# Altium PCB XIREI-V10.PcbDoc
Units mil, origin at the board's own origin, x right, y up, seen from the top; angles counter-clockwise.
Board outline 6000 x 4000 mil, 2 copper layers (Top Layer, Bottom Layer); 57 components, 73 nets, 265 pads, 69 vias.
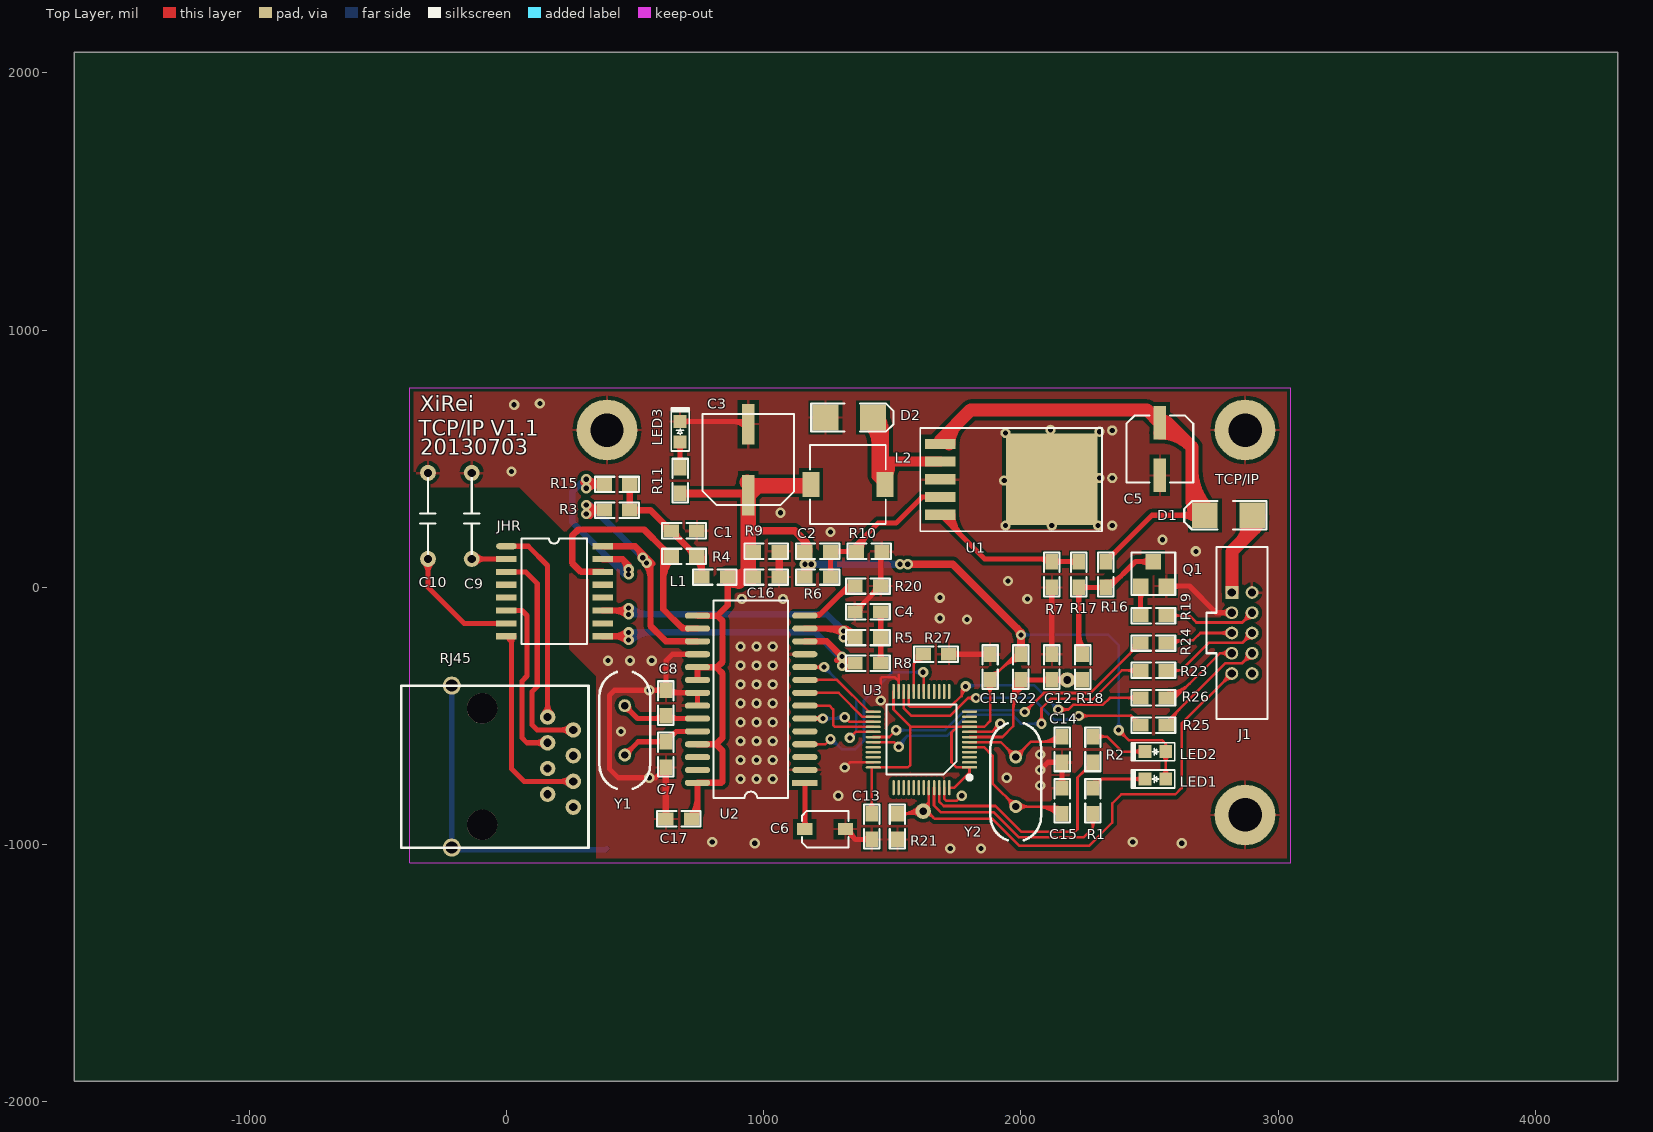
[diagram p0: Top Layer view]
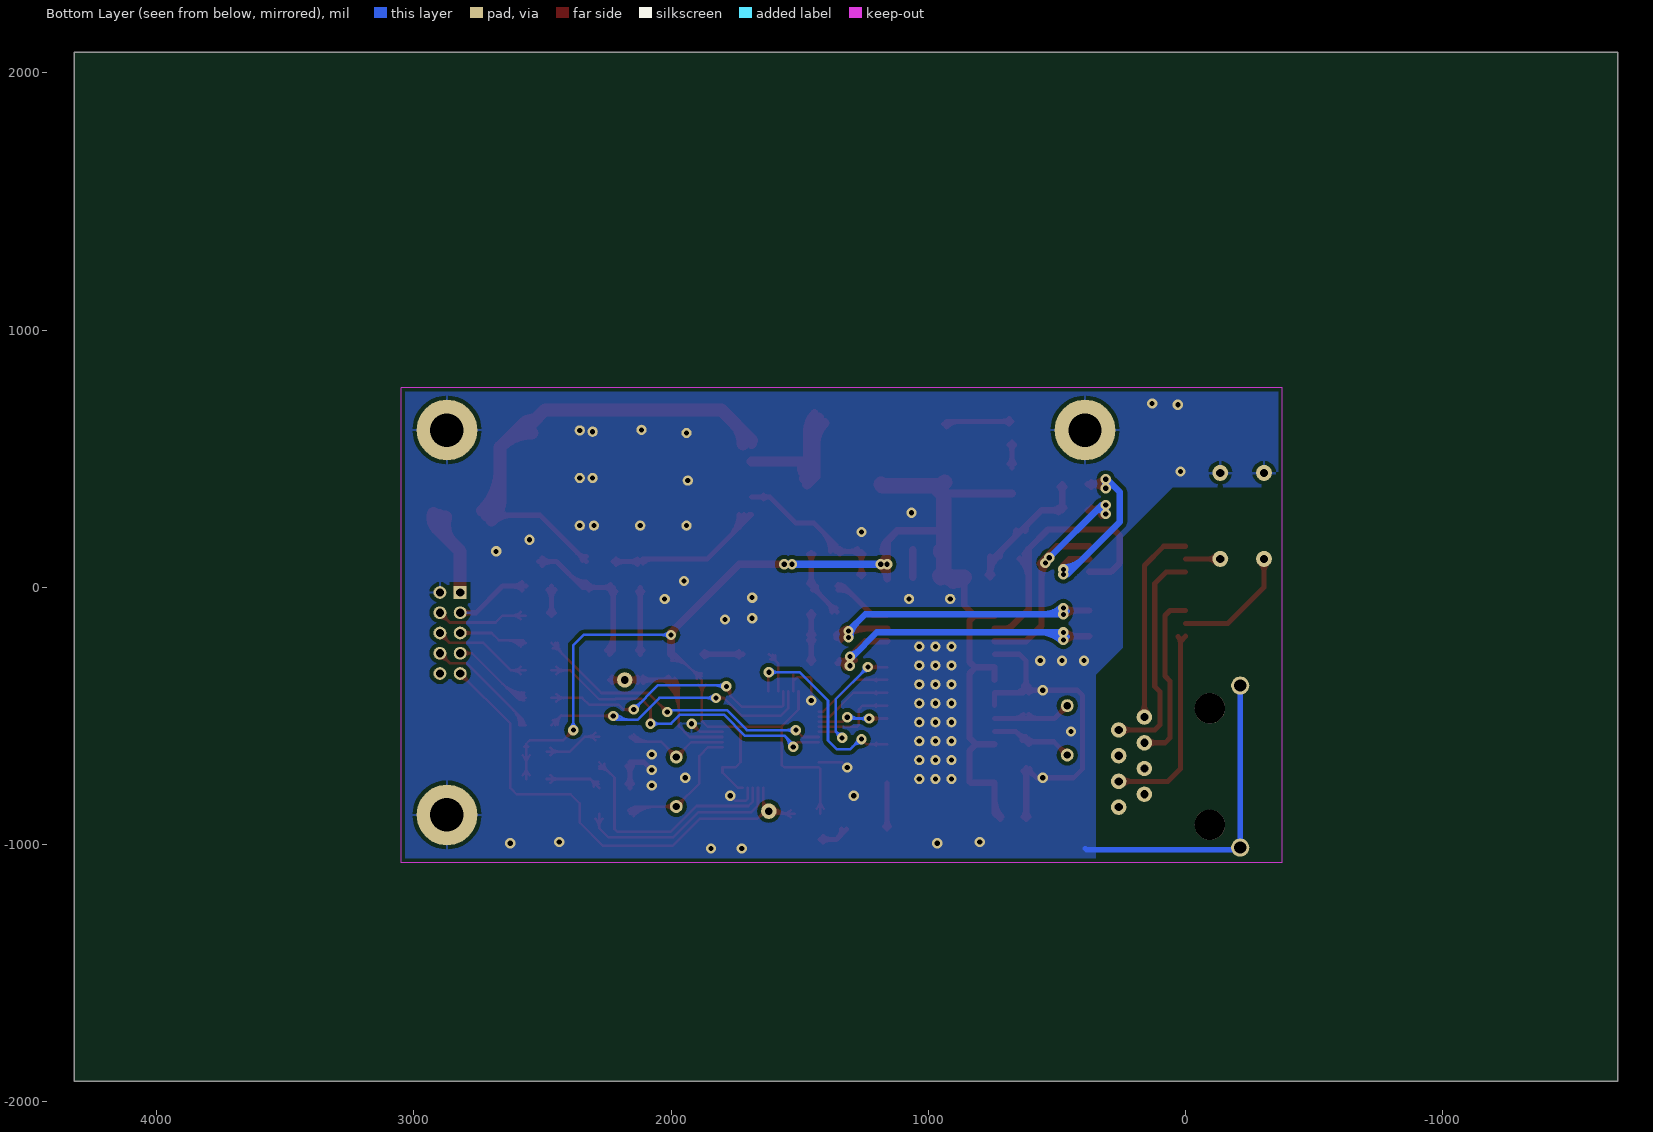
[diagram p1: Bottom Layer view, seen from below]

## Layer stack, top to bottom
Top Layer: signal copper 1.4
Dielectric: dielectric 12.6, FR-4, Dk 4.8
Bottom Layer: signal copper 1.4

## Board outline
-1680,-1920 4320,-1920 4320,2080 -1680,2080

## Design rules (kind name [scope] priority, off if disabled: settings)
Clearance [All] p1: gap=8
PolygonConnect [All] p1: connectstyle=Relief reliefconductorwidth=10 reliefentries=4 polygonreliefangle="90 Angle"
RoutingVias [All] p1: holewidth=20 width=40 viastyle="Through Hole" minholewidth=3 minwidth=10 maxholewidth=78.74 maxwidth=80
SilkscreenOverComponentPads [All] p1: minsilkscreentomaskgap=10
SolderMaskExpansion [All] p1: expansion=4
TestPointUsage [All] p1: valid=0 allowmultiple=FALSE
Testpoint [All] p1: side=15 testpointundercomponent=TRUE minsize=40 maxsize=100 preferedsize=60 minholesize=0 maxholesize=40 preferedholesize=32 testpointgrid=1 style=1023 order=0123456789
Width [All] p1: maxlimit=100 minlimit=5 preferedwidth=10
23 further rules are at their usual default settings.

## Components (designator, comment, footprint, x,y, rotation, side; value= is the part's Value field where it differs from the comment)
C1 "0.01uF" 0805 640,220 r180 top
C2 "102" 0805 1160,140 r180 top
C3 "6V/470u(8)" SW-06 940,280 r180 top
C4 "0.01uF" 0805 1455,-95 r0 top
C5 "25V/22u(6)" "CAP 22uF/25V" 2540,640 r0 top
C6 "10uF" "CAP 10uF/16V" 1160,-940 r90 top
C7 "30P" 0805 620,-700 r270 top
C8 "30P" 0805 620,-400 r90 top
C9 "103" C1 -135,445 r270 top
C10 "103" C1 -305,445 r270 top
C11 "0.1UF" 0805 1880,-360 r270 top
C12 "0.1uf" 0805 2120,-360 r270 top
C13 "0.1UF" 0805 1420,-880 r90 top
C14 "20P" 0805 2160,-680 r270 top
C15 "20P" 0805 2160,-780 r90 top
C16 "104" 0805 960,40 r180 top
C17 "104" 0805 720,-900 r0 top
D1 "4004" SMD-D1 2900,280 r0 top
D2 "SS12" SMD-D1 1240,660 r180 top
J1 "2.0*10" J2.0-2*10 2820,-20 r0 top
JHR "" SMD-16B 0,160 r270 top (schematic designator JHR1)
L1 "10UH" 0805 760,40 r180 top
L2 "100u" 55 1180,400 r90 top
LED1 "RED" LED0805 2563,-745 r180 top
LED2 "YELLOW" LED0805 2563,-638.5 r180 top
LED3 "红色" LED0805 675,565 r90 top
Q1 "2N5551" SMD-Q1 2515,100 r270 top
R1 "2.7K" 0805 2280,-880 r270 top
R2 "2.7K" 0805 2280,-680 r270 top
R3 "50R" 0805 380,300 r180 top
R4 "50R" 0805 640,120 r180 top
R5 "1k" 0805 1355,-195 r180 top
R6 "3.3K" 0805 1260,40 r0 top
R7 "1K" 0805 2120,100 r90 top
R8 "1k" 0805 1355,-295 r180 top
R9 "1K" 0805 1060,140 r0 top
R10 "2K" 0805 1460,140 r0 top
R11 "3K" 0805 675,465 r90 top
R15 "100" 0805 480,400 r0 top
R16 "100K" 0805 2330,0 r270 top
R17 "220" 0805 2225,100 r90 top
R18 "220" 0805 2240,-260 r90 top
R19 "10K" 0805 2465,-110 r180 top
R20 "2.7K" 0805 1355,5 r180 top
R21 "100K" 0805 1520,-980 r270 top
R22 "100K" 0805 2000,-260 r90 top
R23 "220" 0805 2565,-323 r0 top
R24 "220" 0805 2565,-216.5 r0 top
R25 "220" 0805 2465,-536 r180 top
R26 "220" 0805 2465,-429.5 r180 top
R27 "100K" 0805 1720,-260 r0 top
RJ45 "CON10" RJ45 260,-500 r270 top (schematic designator RJ1)
U1 "LM2596S-ADJ" 44 2120,420 r180 top
U2 "ENC28J60" SOP-28 1160,-760 r180 top
U3 "STM32" LQFP-48 1800,-700 r180 top
Y1 "25MHZ" XTAL_US 460,-460 r270 top
Y2 "8MHZ" XTAL_US 1980,-660 r270 top

## Footprints (in the part's own frame and the unit in brackets; to place one, negate y for a bottom-side part, rotate by r counter-clockwise, add the part's x,y. Pads: shape width x height; smd on the part's side, far side on the other; paste and mask are expansions set on the pad)
44 [mm]
  rect 3x1 smd: 1(11,-3.5) 2(11,-1.75) 3(11,0) 4(11,1.75) 5(11,3.5)
  rect 9x9 smd: 6(0,0)
  silkscreen extent -4.97,-5.08 12.98,5.12
55 [mm]
  rect 2.5x1.7 smd: 1(0,-7.4) 2(0,-0.1)
  silkscreen extent -3.91,-7.49 3.9,0
0805 [mil]
  rect 60x50 smd: 1(0,0) 2(-100,0)
  silkscreen extent -135,-30 35,30
C1 [mil]
  round 62 hole 32: 1(334.65,0) 2(0,0)
  silkscreen extent 20,-30 315,30
"CAP 10uF/16V" [mm]
  rect 1.2x1.5 smd: 1(0,0) 2(0,-4)
  silkscreen extent -1.8,-4.3 1.8,0.3
"CAP 22uF/25V" [mm]
  rect 1.2x3.3 smd: 1(0,0) 2(0,-5.2)
  silkscreen extent -3.3,-5.9 3.3,0.7
J2.0-2*10 [mm]
  rect 1.27x1.27 hole 0.813: 1(0,0)
  round 1.27 hole 0.813: 2(2,0) 3(0,-2) 4(2,-2) 5(0,-4) 6(2,-4) 7(0,-6) 8(2,-6) 9(0,-8) 10(2,-8)
  silkscreen extent -2.5,-12.5 3.5,4.5
LED0805 [mil]
  rect 50x50 smd: 1(0,0) 2(80,0)
  silkscreen extent -35,-35 134,35
LQFP-48 [mm]
  rect 1.5x0.25 smd: 1(0,0)
  oval 1.5x0.25 smd: 2(0,-0.5) 3(0,-1) 4(0,-1.5) 5(0,-2) 6(0,-2.5) 7(0,-3) 8(0,-3.5) 9(0,-4) 10(0,-4.5) 11(0,-5) 12(0,-5.5) 25(9.5,-5.5) 26(9.5,-5) 27(9.5,-4.5) 28(9.5,-4) 29(9.5,-3.5) 30(9.5,-3) 31(9.5,-2.5) 32(9.5,-2) 33(9.5,-1.5) 34(9.5,-1) 35(9.5,-0.5) 36(9.5,0)
  oval 0.25x1.5 smd: 13(2,-7.5) 14(2.5,-7.5) 15(3,-7.5) 16(3.5,-7.5) 17(4,-7.5) 18(4.5,-7.5) 19(5,-7.5) 20(5.5,-7.5) 21(6,-7.5) 22(6.5,-7.5) 23(7,-7.5) 24(7.5,-7.5) 37(7.5,2) 38(7,2) 39(6.5,2) 40(6,2) 41(5.5,2) 42(5,2) 43(4.5,2) 44(4,2) 45(3.5,2) 46(3,2) 47(2.5,2) 48(2,2)
  silkscreen extent -0.2,-6.21 8.21,1.2
RJ45 [mm]
  round 3 hole 3: 0(-0.75,-9) 0(10.75,-9)
  round 1.524 hole 0.813: 1(0.11,-2.54) 2(1.38,0) 3(2.65,-2.54) 4(3.92,0) 5(5.19,-2.54) 6(6.46,0) 7(7.73,-2.54) 8(9,0)
  round 1.8 hole 1.2: 9(-3,-12) 10(13,-12)
  silkscreen extent -3,-17 13,1.5
SMD-16B [mil]
  oval 24x80 smd: 1(0,0)
  rect 24x80 smd: 2(50,0) 3(100,0) 4(150,0) 5(200,0) 6(250,0) 7(300,0) 8(350,0) 9(350,374.02) 10(300,374.02) 11(250,374.02) 12(200,374.02) 13(150,374.02) 14(100,374.02) 15(50,374.02) 16(0,374.02)
  silkscreen extent -30,58 380,313
SMD-D1 [mil]
  rect 100x100 smd: 1(0,0) 2(-185,0)
  silkscreen extent -265,-55 55,55
SMD-Q1 [mil]
  rect 60x60 smd: B(95,-50) C(0,0) E(95,50)
  silkscreen extent -35,-85 130,85
SOP-28 [mm]
  rect 2.5x0.6 smd: 1(0,0)
  oval 2.5x0.6 smd: 2(0,-1.27) 3(0,-2.54) 4(0,-3.81) 5(0,-5.08) 6(0,-6.35) 7(0,-7.62) 8(0,-8.89) 9(0,-10.16) 10(0,-11.43) 11(0,-12.7) 12(0,-13.97) 13(0,-15.24) 14(0,-16.51) 15(10.6,-16.51) 16(10.6,-15.24) 17(10.6,-13.97) 18(10.6,-12.7) 19(10.6,-11.43) 20(10.6,-10.16) 21(10.6,-8.89) 22(10.6,-7.62) 23(10.6,-6.35) 24(10.6,-5.08) 25(10.6,-3.81) 26(10.6,-2.54) 27(10.6,-1.27) 28(10.6,0)
  silkscreen extent 1.65,-18 9.02,1.5
SW-06 [mm]
  rect 1.27x4 smd: 1(0,-2) 2(0,-9)
  silkscreen extent -4.5,-10 4.5,-1
XTAL_US [mil]
  round 50 hole 28: 1(0,0) 2(192.13,0)
  silkscreen extent -131,-98 323,98

## Part data
C1 C4 C6 C7 C8 C11 C12 C13 C14 C15: library part CAP, "Capacitor"
C2 C9 C10 C16 C17: library part CAP
C3 C5: library part ELECTRO1
D1 D2: library part DIODE
J1: library part CON10, "Connector"
JHR: library part CON16, "Connector"
L1 R3 R4 R5 R8: library part RES1
L2: library part L-1
LED1 LED2: library part LED85YEL, "Yellow LED"
LED3: library part LED
Q1: library part NPN
R1 R2 R6 R7 R9 R10 R11 R15 R16 R17 R18 R19 R20 R21 R22 R23 R24 R25 R26 R27: library part RES2
RJ45: "Connector"
U1: library part LM2596
U2 U3: library part Component_1
Y1 Y2: library part XTAL, "Crystal Oscillator"

## Free pads (board coordinates)
  round 236.22 hole 129.92: 0(390.98,611.41) 1(2871.3,611.41) 2(2871.3,-884.65)
  round 60 hole 30: 0(2180,-360) 1(1620,-870)
  round 40 hole 20: 2(2305,605) 3(2305,425) 4(2300,240) 5(2120,240) 6(1940,240) 7(1935,415) 8(1940,600) 9(2115,612.17) 10(2355,610) 11(2355,425) 12(2355,240) 13(1075,-45) 14(915,-45) 15(910,-230) 16(972.5,-230) 17(1035,-230) 18(910,-303.57) 19(972.5,-303.57) 20(1035,-303.57) 21(910,-377.14) 22(972.5,-377.14) 23(1035,-377.14) 24(910,-450.71) 25(972.5,-450.71) 26(1035,-450.71) 27(910,-524.29) 28(972.5,-524.29) 29(1035,-524.29) 30(910,-597.86) 31(972.5,-597.86) 32(1035,-597.86) 33(910,-671.43) 34(972.5,-671.43) 35(1035,-671.43) 36(910,-745) 37(972.5,-745) 38(1035,-745)

## Via types
v1: diameter 40, hole 20, Top Layer to Bottom Layer, 69 vias

## Nets (pads, with @x,y where several pads share a name; then routed paths per layer and width w, separated by ;. In a path a pad name is that pad's centre, name@x,y a point inside that pad or via, vN(x,y) a via of type N, cw(c..) or ccw(c..) an arc to the next point about the centre after c; other vN are vias at no path point)
+5: C2.1 C3.1 C11.1 C13.1 C16.1 C17.1 L1.2 L2.2 LED1.1 LED2.1 R6.2 R9.2 R11.2 R22.1 U2.15 U2.19 U2.20 U2.25 U2.28 U3.1 U3.9 U3.24 U3.36 U3.48 | length 8081.5
  Top Layer w10: C13.1@1405.86,-860.86 ccw(c1371.72,-826.72) 1420,-826.72 ccw(c1468.28,-826.72) C13.1@1434.14,-860.86 ; C13.1 1420,-705.99 U3.36 1560,-700 1570,-690 1570,-540.28 ; U3.24 1504.73,-475 1570,-540.28 ; U3.48 1741.26,-778.74 1800,-720 U3.1 1750,-700 1730,-680 1730,-565.04 1752.52,-542.52 ; C11.1@1865.86,-379.14 cw(c1831.72,-413.28) 1880,-413.28 cw(c1928.28,-413.28) C11.1@1894.14,-379.14 ; C11.1@1880,-345 ccw(c1880,-308.79) 1905.61,-334.39 ; C11.1@1880,-335 ccw(c1880,-274.64) 1922.68,-317.32 ; C11.1@1900,-355 cw(c1936.21,-355) 1910.61,-329.39 ; 1923.18,-316.82 cw(c2000,-393.64) R22.1@2000,-285 ; 1940.25,-299.75 cw(c2000,-359.5) R22.1@2000,-275 ; 1957.32,-282.68 cw(c2000,-325.36) R22.1@2000,-265 ; 1974.39,-265.61 cw(c2000,-291.21) R22.1@2000,-255 ; R22.1 1980,-260 C11.1 1880,-520 1857.48,-542.52 U3.9 1752.52,-542.52 ; v1(2000,-185) v1@2000,-175 ; v1@2380,-570 cw(c2380,-606.21) 2405.61,-580.61 cw(c2431.21,-555) v1@2395,-555 ; v1(2380,-555) 2420,-595 2550,-595 2563,-608 ; LED1.1@2548.86,-730.86 ccw(c2514.72,-696.72) 2563,-696.72 ccw(c2611.28,-696.72) LED1.1@2577.14,-730.86 ; LED2.1@2548.86,-652.64 cw(c2514.72,-686.78) 2563,-686.78 cw(c2611.28,-686.78) LED2.1@2577.14,-652.64 ; LED2.1@2555.03,-620.16 ccw(c2549.75,-608) 2563,-608 ; LED1.1 LED2.1 2563,-608 ; LED2.1@2570.97,-620.16 cw(c2576.25,-608) 2563,-608 ; 1570,-540.28 1572.24,-542.52 1752.52,-542.52
  Top Layer w25: C17.1@716.16,-891.16 ccw(c652.15,-827.15) 742.68,-827.15 ; C17.1 742.68,-877.32 U2.28 835,-760 840,-755 840,-635 815,-610 ; U2.25 815,-610 ; U2.20 U2.19 820,-310 ; U2.15 820,-110 ; L1.2@851.16,31.16 cw(c829.82,9.82) 860,9.82 cw(c890.18,9.82) L1.2@868.84,31.16 ; L1.2 860,-70 820,-110 ; 815,-610 840,-585 840,-335 820,-315 820,-310 ; 820,-310 840,-290 840,-130 820,-110
  Top Layer w30: R11.2 C3.1@946.26,365 ; 900.74,365 cw(c900.74,319.48) C3.1@932.93,351.67 ; 940,235 955,220 1120,220 1160,180 C2.1 ; 1157.32,182.68 cw(c1114.64,140) C2.1@1175,140 ; R6.2@1160,34.1 cw(c1222.08,34.1) v1@1187.76,85.83 ; R6.2 v1(1160,90) ; 1171.18,110.83 ccw(c1185,90) v1(1160,90) ; 1173.24,67.94 cw(c1185,90) v1(1160,90) ; v1(1185,90) v1(1160,90) ; v1@1187.35,94.41 cw(c1211.66,140) C2.1 ; v1(1530,90) v1(1560,90) 1735,90 v1@2000,-175 ; 1984.39,-159.39 cw(c1958.79,-185) v1@1995,-185 ; R22.1 v1(2000,-185) ; v1(1160,90) C2.1
  Top Layer w60: L1.2 920,40 ; L1.2@861.98,36.01 ccw(c888.7,71.29) 920,40 ; L1.2@864.26,35.06 ccw(c877.41,122.59) C16.1@940,60 ; 903.79,23.79 cw(c955,-27.43) C16.1@955,45 ; C16.1@940,64.14 ccw(c979.14,64.14) C16.1@951.46,36.46 ; R9.2@940,115.86 cw(c979.14,115.86) R9.2@951.46,143.54 ; R9.2@940,164.14 ccw(c979.14,164.14) R9.2@951.46,136.46 ; L2.2 1178.94,395 976.26,395 946.26,365 C3.1 940,235 C16.1@940,60 ; 920,40 C16.1@940,60 ; C3.1@936.46,408.94 ccw(c970.13,442.61) 970.13,395 cw(c970.13,442.61) C3.1@936.46,408.94
  Bottom Layer w10: v1(2000,-185) 2340,-185 2380,-225 v1(2380,-555) ; v1@2010.61,-195.61 cw(c2036.21,-221.21) 2036.21,-185 cw(c2036.21,-148.79) v1@2010.61,-174.39 ; v1@2369.39,-544.39 ccw(c2343.79,-518.79) 2380,-518.79 ccw(c2416.21,-518.79) v1@2390.61,-544.39
  Bottom Layer w30: v1(1160,90) v1(1185,90) v1(1530,90) v1(1560,90)
+12: D1.1 J1.1 | length 601.1
  Top Layer w50: J1.1 2820,140 2900,220 ; 2850,170 ccw(c2776.73,243.28) D1.1@2876.04,272.86 ; D1.1@2882.4,262.25 cw(c2840.51,220) 2900,220 ; D1.1 2900,220 ; 2909.32,229.32 ccw(c2868.14,270.51) D1.1@2923.96,287.14 ; D1.1@2917.6,262.25 ccw(c2959.49,220) 2900,220
BOOT0: J1.9 pad.1@1620,-870 R21.2 U3.44 | length 2334.7
  Top Layer w10: R21.2 1597.52,-880 1642.52,-835 ; R21.2@1534.14,-894.14 cw(c1568.28,-928.28) 1568.28,-880 cw(c1568.28,-831.72) R21.2@1534.14,-865.86 ; R21.2@1535.5,-880 ccw(c1535.5,-785.5) pad.1@1602.32,-852.32 ; 1559.64,-880 ccw(c1559.64,-809.64) pad.1@1609.39,-859.39 ; pad.1@1602.32,-887.68 ccw(c1583.79,-906.21) 1583.79,-880 ccw(c1583.79,-833.79) pad.1@1616.46,-866.46 ; pad.1@1623.49,-884.59 cw(c1632.5,-922.23) 1659.86,-894.86 ; U3.44 1642.52,-835 ; pad.1@1645,-870 ccw(c1669.14,-870) 1652.07,-887.07 ; J1.9@2800,-334.96 cw(c2751.72,-334.96) 2785.86,-369.1 cw(c2820,-403.25) J1.9@2820,-354.96 ; J1.9 2625,-529.96 2625,-780 2600,-805 2390,-805 2355,-840 2355,-915 2265,-1005 1993.69,-1005 1888.69,-900 1665,-900 1642.52,-877.52 1642.52,-835
CLKOUT: U2.3
CS: U2.9 U3.25 | length 343
  Top Layer w10: U2.9 1285,-360 1408.47,-483.47 U3.25 ; U2.9@1202.22,-364.82 cw(c1213.84,-376.44) 1213.84,-360 cw(c1213.84,-343.56) U2.9@1202.22,-355.18
ERX+: JHR.6 RJ45.3 | length 755.4
  Top Layer w20: JHR.6 60,-90 80,-110 80,-345 60,-365 60,-585 79.33,-604.33 RJ45.3 ; RJ45.3@145.86,-618.47 ccw(c111.72,-652.62) 111.72,-604.33 ccw(c111.72,-556.05) RJ45.3@145.86,-590.19
ERX-: JHR.8 RJ45.6 | length 907.6
  Top Layer w20: JHR.8 20,-210 20,-705 69.33,-754.33 RJ45.6 ; 20,-214.14 cw(c52.14,-214.14) JHR.8@29.41,-191.41 ; 20,-211.54 cw(c46.2,-211.54) JHR.8@29.29,-191.53 ; RJ45.6@245.86,-768.47 ccw(c211.72,-802.62) 211.72,-754.33 ccw(c211.72,-706.05) RJ45.6@245.86,-740.19
ETX+: JHR.1 RJ45.1 | length 856.2
  Top Layer w20: JHR.1 85,160 160,85 160,-500 RJ45.1 ; RJ45.1@145.86,-490.19 ccw(c111.72,-456.05) 160,-456.05 ccw(c208.28,-456.05) RJ45.1@174.14,-490.19
ETX-: JHR.3 RJ45.2 | length 940.8
  Top Layer w20: JHR.3 75,60 120,15 120,-385 100,-405 100,-535 119.33,-554.33 RJ45.2 ; RJ45.2@245.86,-568.47 ccw(c211.72,-602.62) 211.72,-554.33 ccw(c211.72,-506.05) RJ45.2@245.86,-540.19
GND: C1.2 C3.2 C4.2 C5.2 C6.2 C7.1 C8.1 C9.2 C10.2 C11.2 C12.2 C13.2 C14.1 C15.1 C16.2 C17.2 D2.1 J1.2 J1.3 LED3.2 pad.0@390.98,611.41 pad.1@2871.3,611.41 pad.2 pad.3 pad.4 pad.5 pad.6 pad.7 pad.8 pad.9 pad.10 pad.11 pad.12 pad.13 pad.14 pad.15 pad.16 pad.17 pad.18 pad.19 pad.20 pad.21 pad.22 pad.23 pad.24 pad.25 pad.26 pad.27 pad.28 pad.29 pad.30 pad.31 pad.32 pad.33 pad.34 pad.35 pad.36 pad.37 pad.38 Q1.E R7.2 R9.1 R10.1 R20.2 R21.1 R27.1 RJ45.9 RJ45.10 U1.3 U1.6 U2.2 U2.11 U2.18 U2.21 U2.22 U3.8 U3.23 U3.35 U3.47 | length 6234.5
  Top Layer w10: v1(1315,-700) 1334.68,-680.32 U3.35 ; v1(1455,-440) 1455,-355 1460,-350 1510,-350 1524.41,-364.41 U3.23 1524.41,-360 1524.41,-340.59 1525,-340 ; U3.47 1701.57,-821.57 1710,-830 1750,-830 v1(1770,-810) ; U3.8 1887.8,-562.2 v1(1920,-530) ; v1@1905,-530 cw(c1868.79,-530) 1894.39,-555.61 cw(c1920,-581.21) v1@1920,-545
  Top Layer w20: 585.86,-734.14 cw(c620,-768.28) C7.1@620,-720 ; C7.1@597.93,-722.07 ccw(c580.86,-705) C7.1@605,-705 ; C8.1@609.39,-410.61 ccw(c583.79,-436.21) 583.79,-400 ccw(c583.79,-363.79) C8.1@609.39,-389.39 ; C8.1@609.39,-384.39 ccw(c583.79,-358.79) 620,-358.79 ccw(c656.21,-358.79) C8.1@630.61,-384.39 ; C7.1 580,-740 435,-740 400,-705 400,-420 420,-400 C8.1 ; C8.1@630.61,-394.39 ccw(c668.28,-356.72) 668.28,-410 ; LED3.2 929.33,645 C3.2 ; LED3.2@685.61,634.39 cw(c711.21,608.79) 711.21,645 cw(c711.21,681.21) LED3.2@685.61,655.61 ; U2.22 U2.21 630,-410 C8.1 ; U2.18 645,-260 620,-285 C8.1 ; 878.03,645 cw(c878.03,572.36) C3.2@929.39,623.72 ; C6.2 1357.48,-980 C13.2 ; C6.2@1337.01,-940 ccw(c1384.15,-940) 1350.82,-973.34 ; C4.2 R20.2 R10.1@1455,135 ; C4.2@1360,-80 ccw(c1360,-55.86) C4.2@1377.07,-72.93 ; C4.2@1375,-95 cw(c1423.28,-95) 1389.14,-60.86 ; C13.2@1409.39,-990.61 ccw(c1383.79,-1016.21) 1383.79,-980 ccw(c1383.79,-943.79) C13.2@1409.39,-969.39 ; 1420.86,-29.14 ccw(c1386.72,5) R20.2@1435,5 ; R20.2@1432.93,-17.07 cw(c1450,-34.14) R20.2@1450,-10 ; R20.2@1444.39,15.61 ccw(c1418.79,41.21) 1455,41.21 ccw(c1491.21,41.21) R20.2@1465.61,15.61 ; R10.1@1444.39,129.39 cw(c1418.79,103.79) 1455,103.79 cw(c1491.21,103.79) R10.1@1465.61,129.39 ; R27.1 C11.2 ; R27.1@1735.61,-270.61 cw(c1761.21,-296.21) 1761.21,-260 cw(c1761.21,-223.79) R27.1@1735.61,-249.39 ; C11.2@1869.39,-270.61 ccw(c1843.79,-296.21) 1843.79,-260 ccw(c1843.79,-223.79) C11.2@1869.39,-249.39 ; v1@2080,-705 2105,-680 C14.1 C15.1 ; C12.2@2109.39,-244.39 ccw(c2083.79,-218.79) 2120,-218.79 ccw(c2156.21,-218.79) C12.2@2130.61,-244.39 ; R7.2@2109.39,-15.61 cw(c2083.79,-41.21) 2120,-41.21 cw(c2156.21,-41.21) R7.2@2130.61,-15.61 ; C12.2 R7.2 ; C15.1@2149.39,-764.39 ccw(c2123.79,-738.79) 2160,-738.79 ccw(c2196.21,-738.79) C15.1@2170.61,-764.39 ; C14.1@2149.39,-695.61 cw(c2123.79,-721.21) 2160,-721.21 cw(c2196.21,-721.21) C14.1@2170.61,-695.61 ; Q1.E 2655,5 2758.74,-98.74 J1.3 ; Q1.E@2579.14,-9.14 cw(c2613.28,-43.28) 2613.28,5 cw(c2613.28,53.28) Q1.E@2579.14,19.14 ; J1.3@2809.39,-109.35 ccw(c2783.79,-134.95) 2783.79,-98.74 ccw(c2783.79,-62.53) J1.3@2809.39,-88.13
  Top Layer w25: C17.2@611.16,-891.16 ccw(c589.82,-869.82) 620,-869.82 ccw(c650.18,-869.82) C17.2@628.84,-891.16 ; C17.2 620,-740 ; 620,-735.18 cw(c650.18,-735.18) 628.84,-713.84 ccw(c650.18,-735.18) 620,-735.18 ; 620,-735.18 ccw(c589.82,-735.18) 611.16,-713.84 cw(c589.82,-735.18) 620,-735.18
  Top Layer w30: C16.2 R9.1 R9.1@1060,145
  Bottom Layer w10: v1(1920,-530) v1@1930,-530
  Bottom Layer w20: RJ45.9 RJ45.10 -204.25,-1020 385,-1020 390,-1015
  other v1: 1725,-1015 1845,-1015 965,-995 2625,-995 800,-990 2435,-990 1290,-810 2075,-770 555,-740 1945,-740 2075,-710 2075,-650 445,-560 555,-400 395,-285 480,-285 565,-285 1790,-125 1685,-120 2025,-45 1685,-40 1950,25 2680,140 2550,185 1260,215 1065,290 20,450 30,710 130,715
GP: R7.1 R17.1 U1.5 | length 934.4
  Top Layer w20: U1.5 1859.13,110 2110,110 R7.1 R17.1 ; U1.5@1695.98,282.2 ccw(c1717.84,282.2) U1.5@1702.39,266.75 ; U1.5@1715.98,282.2 ccw(c1786.13,282.2) 1736.53,232.6 ; U1.5@1735.98,282.2 ccw(c1854.41,282.2) 1770.67,198.46 ; 2071.72,110 cw(c2071.72,56.72) R7.1@2109.39,94.39 ; R7.1@2130.61,89.39 cw(c2156.21,63.79) 2156.21,100 cw(c2156.21,136.21) R7.1@2130.61,110.61 ; R17.1@2214.39,89.39 ccw(c2188.79,63.79) 2188.79,100 ccw(c2188.79,136.21) R17.1@2214.39,110.61
INT(PB0): U2.4 U3.18 | length 934.4
  Top Layer w10: U2.4 1240,-610 v1(1260,-590) ; U2.4@1202.22,-614.82 cw(c1213.84,-626.44) 1213.84,-610 cw(c1213.84,-593.56) U2.4@1202.22,-605.18 ; v1(1620,-330) 1622.84,-332.84 U3.18
  Bottom Layer w10: v1@1260,-605 cw(c1260,-653.28) 1294.14,-619.14 ; v1@1260,-595 cw(c1260,-619.14) 1277.07,-602.07 ; v1(1260,-590) 1265,-590 1305,-630 1355,-630 1390,-595 1390,-440 1500,-330 v1(1620,-330) ; v1@1275,-590 ccw(c1299.14,-590) 1282.07,-607.07 ; v1@1609.39,-340.61 ccw(c1583.79,-366.21) 1583.79,-330 ccw(c1583.79,-293.79) v1@1609.39,-319.39
L_C: J1.7 R26.2 | length 693.7
  Top Layer w10: R26.2 2600,-429.5 ; R26.2@2570,-439.5 ccw(c2570,-391.22) 2604.14,-425.36 ; R26.2@2570,-429.5 ccw(c2570,-357.07) 2621.21,-408.29 ; R26.2@2570,-419.5 ccw(c2570,-322.93) 2638.28,-391.22 ; R26.2@2570,-409.5 ccw(c2570,-288.79) 2655.36,-374.14 ; R26.2@2588.46,-437.19 cw(c2600,-442) 2600,-429.5 ; R26.2@2588.46,-421.81 ccw(c2600,-417) 2600,-429.5 ; J1.7@2805.53,-270.03 ccw(c2773.28,-300.79) 2773.28,-256.22 ; J1.7@2805.53,-242.42 cw(c2773.28,-211.66) 2773.28,-256.22 ; J1.7 2773.28,-256.22 ; 2600,-429.5 2773.28,-256.22
L_S: J1.8 R25.2 | length 714.9
  Top Layer w10: R25.2@2570,-536 cw(c2608.63,-536) 2581.31,-508.69 ; R25.2@2580,-536 cw(c2642.77,-536) 2598.38,-491.62 ; R25.2@2580,-511.86 ccw(c2594.14,-511.86) R25.2@2584.14,-521.86 ; R25.2@2589,-536 R25.2 2580,-521 2580,-510 2795,-295 2859.96,-295 J1.8 ; R25.2@2590,-536 cw(c2676.91,-536) 2615.46,-474.54 ; J1.8@2878.74,-256.22 cw(c2830.46,-256.22) 2864.6,-290.36 cw(c2898.74,-324.51) J1.8@2898.74,-276.22
LED_TEST: R2.1 U3.46 | length 1033.5
  Top Layer w10: U3.46 1681.89,-831.89 1700,-850 1900.91,-850 2000.91,-950 2210,-950 2220,-940 2220,-740 R2.1 ; 2237.32,-722.68 cw(c2280,-765.36) R2.1@2280,-705 ; 2249.39,-710.61 ccw(c2223.79,-685) R2.1@2260,-685 ; 2254.39,-705.61 cw(c2280,-731.21) R2.1@2280,-695
NetC2_2: C2.2 R6.1 R10.2 U1.4 | length 1026
  Top Layer w20: R6.1@1249.39,50.61 ccw(c1223.79,76.21) 1260,76.21 ccw(c1296.21,76.21) R6.1@1270.61,50.61 ; C2.2@1249.39,129.39 cw(c1223.79,103.79) 1260,103.79 cw(c1296.21,103.79) C2.2@1270.61,129.39 ; R6.1 C2.2 R10.2 ; C2.2@1275.61,129.39 cw(c1301.21,103.79) 1301.21,140 cw(c1301.21,176.21) C2.2@1275.61,150.61 ; R10.2@1344.39,129.39 ccw(c1318.79,103.79) 1318.79,140 ccw(c1318.79,176.21) R10.2@1344.39,150.61 ; 1377.68,182.68 ccw(c1420.36,140) R10.2 ; R10.2@1380,140 cw(c1488.64,140) 1411.82,216.82 ; U1.4@1640.71,344.25 ccw(c1624.18,327.72) 1624.18,351.1 ccw(c1624.18,374.48) U1.4@1640.71,357.95 ; U1.4 1616.1,351.1 1515,250 1445,250 1360,165 R10.2
NetC4_1: C4.1 R5.2 R8.2 | length 427.5
  Top Layer w20: R8.2@1444.39,-284.39 ccw(c1418.79,-258.79) 1455,-258.79 ccw(c1491.21,-258.79) R8.2@1465.61,-284.39 ; R5.2@1444.39,-205.61 cw(c1418.79,-231.21) 1455,-231.21 cw(c1491.21,-231.21) R5.2@1465.61,-205.61 ; R5.2@1444.39,-184.39 ccw(c1418.79,-158.79) 1455,-158.79 ccw(c1491.21,-158.79) R5.2@1465.61,-184.39 ; C4.1@1444.39,-105.61 cw(c1418.79,-131.21) 1455,-131.21 cw(c1491.21,-131.21) C4.1@1465.61,-105.61 ; R8.2 R5.2 C4.1
NetC6_1: C6.1 U2.1 | length 231.7
  Top Layer w20: C6.1@1150.37,-930.37 ccw(c1127.11,-907.11) 1160,-907.11 ccw(c1192.89,-907.11) C6.1@1169.63,-930.37 ; C6.1 U2.1
NetC7_2: C7.2 U2.24 Y1.2 | length 491.5
  Top Layer w20: Y1.2 512.13,-600 C7.2 660,-560 U2.24 ; Y1.2@460,-637.13 ccw(c460,-600.91) 485.61,-626.52 ccw(c511.21,-652.13) Y1.2@475,-652.13 ; C7.2@609.39,-610.61 ccw(c583.79,-636.21) 583.79,-600 ccw(c583.79,-563.79) C7.2@609.39,-589.39 ; C7.2@620,-580 ccw(c620,-531.72) 654.14,-565.86 ; C7.2@635,-595 cw(c659.14,-595) C7.2@642.07,-577.93
NetC8_2: C8.2 U2.23 Y1.1 | length 444
  Top Layer w20: Y1.1@460,-475 cw(c460,-511.21) 485.61,-485.61 cw(c511.21,-460) Y1.1@475,-460 ; Y1.1 510,-510 U2.23 ; 571.72,-510 ccw(c571.72,-456.72) C8.2@609.39,-494.39 ; C8.2@630.61,-494.39 ccw(c668.28,-456.72) 668.28,-510
NetC9_1: C9.1 JHR.2 | length 214.3
  Top Layer w20: C9.1@-134.65,110 JHR.2 ; C9.1@-120.15,95.5 cw(c-85.16,60.51) -85.16,110 ; C9.1@-120.15,125.2 ccw(c-83.45,161.91) -83.45,110
NetC10_1: C10.1 JHR.7 | length 553
  Top Layer w20: C10.1@-319.85,95.5 cw(c-355.7,59.66) -305,59.66 cw(c-254.3,59.66) C10.1@-290.15,95.5 ; C10.1 -305,0 -165,-140 JHR.7
NetD2_2: D2.2 L2.1 U1.2 | length 1582.9
  Top Layer w30: D2.2@1400.25,635.25 cw(c1228.63,463.63) 1471.34,463.63 ; D2.2@1421.46,656.46 cw(c1301.06,536.06) 1471.34,536.06 ; D2.2@1442.68,677.68 cw(c1373.48,608.48) 1471.34,608.48 ; L2.1@1458.28,428.8 ccw(c1426.76,460.33) 1471.34,460.33 ccw(c1515.92,460.33) L2.1@1484.39,428.8 ; L2.1@1471.34,446.34 D2.2@1471.34,613.66
  Top Layer w40: D2.2@1403.79,638.79 cw(c1316.36,551.36) 1440,551.36 ; D2.2 1440,645 1440,431.34 L2.1 1471.34,446.34 1490.24,465.24 ; 1440,523.91 ccw(c1579.5,523.91) L2.1@1480.86,425.27 ; L2.1@1462.28,425.71 ccw(c1404.86,488.89) 1490.24,488.89 ; L2.1@1465.94,428.08 ccw(c1449.68,465.23) 1490.24,465.23 ; L2.1@1483.34,421.85 cw(c1516.68,438.79) 1490.24,465.24 ; U1.2 1490.24,488.9 ; 1490.24,465.24 1490.24,488.9
NetJHR1_15: JHR.15 R15.2 | length 1142.8
  Top Layer w25: v1@297.63,407.63 ccw(c316.04,426.04) v1@316.04,400 ; v1(310,385) 325,400 R15.2 ; v1@315.3,379.7 cw(c364.32,330.68) R15.2@364.32,400 ; v1@315.3,425.3 ccw(c376.39,486.39) R15.2@376.39,400 ; R15.2@366.16,391.16 ccw(c344.82,369.82) 344.82,400 ccw(c344.82,430.18) R15.2@366.16,408.84 ; JHR.15 450,110 475,85 v1@475,80 ; 451.59,108.41 cw(c413.18,70) v1@467.5,70
  Bottom Layer w25: 273.43,388.43 cw(c307.63,354.23) v1@311.35,402.45 ; 288.66,403.66 cw(c310,382.32) v1@310,412.5 ; v1(310,420) 305,420 255,370 255,255 460,50 v1(475,50) ; 402.45,107.55 ccw(c475,180.1) v1@475,77.5 ; 436.59,73.41 ccw(c475,111.82) v1@475,57.5 ; 445.13,64.87 ccw(c475,94.75) v1@475,52.5
  other v1: 475,70
NetLED1_2: LED1.2 R1.2 | length 377.8
  Top Layer w10: R1.2 2315,-745 ; R1.2@2281.6,-765.13 ccw(c2285.23,-742.85) R1.2@2301.19,-758.81 ; R1.2@2283.21,-755.26 ccw(c2289.09,-719.09) 2315,-745 ; R1.2@2300,-775 cw(c2336.21,-775) 2310.61,-749.39 ; LED1.2@2468.86,-759.14 ccw(c2434.72,-793.28) 2434.72,-745 ccw(c2434.72,-696.72) LED1.2@2468.86,-730.86 ; LED1.2 2315,-745
NetLED2_2: LED2.2 R2.2 | length 378.9
  Top Layer w10: R2.2 2335,-580 2393.5,-638.5 LED2.2 ; R2.2@2294.14,-594.14 cw(c2328.28,-628.28) 2328.28,-580 cw(c2328.28,-531.72) R2.2@2294.14,-565.86 ; LED2.2@2468.86,-652.64 ccw(c2434.72,-686.78) 2434.72,-638.5 ccw(c2434.72,-590.22) LED2.2@2468.86,-624.36
NetLED3_1: LED3.1 R11.1 | length 213.8
  Top Layer w20: R11.1@664.39,480.61 ccw(c638.79,506.21) 675,506.21 ccw(c711.21,506.21) R11.1@685.61,480.61 ; LED3.1@664.39,554.39 cw(c638.79,528.79) 675,528.79 cw(c711.21,528.79) LED3.1@685.61,554.39 ; R11.1 LED3.1
NetQ1_B: Q1.B R19.1 | length 247.7
  Top Layer w20: Q1.B@2450.86,-9.14 cw(c2416.72,-43.28) 2465,-43.28 cw(c2513.28,-43.28) Q1.B@2479.14,-9.14 ; R19.1@2454.39,-99.39 ccw(c2428.79,-73.79) 2465,-73.79 ccw(c2501.21,-73.79) R19.1@2475.61,-99.39 ; R19.1 Q1.B
NetQ1_C: Q1.C R16.1 R17.2 R18.1 | length 1038.3
  Top Layer w20: R17.2@2214.39,-15.61 cw(c2188.79,-41.21) 2225,-41.21 cw(c2261.21,-41.21) R17.2@2235.61,-15.61 ; R18.1@2225,-230.86 ccw(c2264.14,-230.86) R18.1@2236.46,-258.54 ; 2225,-182.57 ccw(c2312.43,-182.57) R18.1@2250.61,-244.39 ; R17.2@2235.61,-10.61 cw(c2261.21,-36.21) 2261.21,0 cw(c2261.21,36.21) R17.2@2235.61,10.61 ; R18.1 2225,-245 R17.2 R16.1 ; R16.1@2319.39,-10.61 ccw(c2293.79,-36.21) 2293.79,0 ccw(c2293.79,36.21) R16.1@2319.39,10.61 ; R16.1@2330,20 ccw(c2330,104.5) 2389.75,44.75 ; 2355.61,10.61 cw(c2330,36.21) R16.1 ; Q1.C@2500.86,85.86 ccw(c2466.72,51.72) 2466.72,100 ccw(c2466.72,148.28) Q1.C@2500.86,114.14 ; Q1.C 2445,100 2345,0 R16.1
NetR20_1: R20.1 U2.14 | length 374.2
  Top Layer w20: U2.14 1215,-110 1330,5 R20.1 ; U2.14@1197.4,-108.19 ccw(c1197.4,-61.33) 1230.54,-94.46 ; 1290.25,-34.75 cw(c1350,-94.5) R20.1@1350,-10 ; 1324.39,-0.61 cw(c1350,-26.21) R20.1@1350,10
NetR23_2: R23.2 U3.31 | length 1505.8
  Top Layer w10: U3.31 1506.57,-601.57 v1(1525,-620) ; v1@2069.39,-519.39 ccw(c2043.79,-493.79) 2080,-493.79 ccw(c2116.21,-493.79) v1@2090.61,-519.39 ; v1(2080,-530) 2080,-470 2117,-433 2214.11,-433 2216.11,-435 2280,-435 2392,-323 R23.2 ; R23.2@2445.86,-337.14 ccw(c2411.72,-371.28) 2411.72,-323 ccw(c2411.72,-274.72) R23.2@2445.86,-308.86
  Bottom Layer w10: v1@1525,-610 1557.5,-577.5 ; v1@1525,-605 ccw(c1525,-592.93) 1533.54,-601.46 ; v1@1530,-619.98 cw(c1565.88,-619.86) 1540.51,-594.49 ; v1@1540,-619.95 cw(c1599.74,-619.75) 1557.5,-577.5 ; v1@2069.39,-540.61 ccw(c2043.79,-566.21) 2043.79,-530 ccw(c2043.79,-493.79) v1@2069.39,-519.39 ; v1(2080,-530) 2000,-530 1965,-495 1795,-495 1712.5,-577.5 1557.5,-577.5
NetR24_2: R24.2 U3.30 | length 1435
  Top Layer w10: U3.30 1488.11,-581.89 v1(1515,-555) ; v1@2015,-500 v1(2015,-485) ; v1@2015,-470 ccw(c2015,-433.79) 2040.61,-459.39 ccw(c2066.21,-485) v1@2030,-485 ; v1@2020,-485 v1(2015,-485) ; 2422.32,-259.18 ccw(c2379.64,-216.5) R24.2@2440,-216.5 ; 2434.39,-247.11 cw(c2460,-272.71) R24.2@2460,-236.5 ; 2439.39,-242.11 ccw(c2413.79,-216.5) R24.2@2450,-216.5 ; R24.2 2270.75,-410.75 2089.25,-410.75 v1(2015,-485)
  Bottom Layer w10: v1(1515,-555) 1705,-555 1783,-477 2007,-477 v1(2015,-485) ; v1@1525.61,-565.61 cw(c1551.21,-591.21) 1551.21,-555 cw(c1551.21,-518.79) v1@1525.61,-544.39
OSCIN: C15.2 U3.5 Y2.2 | length 1001.3
  Top Layer w10: U3.5 1856.26,-621.26 1890,-655 1890,-762.13 Y2.2 2132.13,-852.13 C15.2 ; Y2.2@1960,-852.13 ccw(c1911.72,-852.13) 1945.86,-817.98 ccw(c1980,-783.84) Y2.2@1980,-832.13 ; Y2.2@1994.14,-866.27 cw(c2028.28,-900.41) 2028.28,-852.13 cw(c2028.28,-803.84) Y2.2@1994.14,-837.98 ; 2056.49,-852.13 cw(c2056.49,-978.51) C15.2@2145.86,-889.14 ; 2080.64,-852.13 cw(c2080.64,-954.36) C15.2@2152.93,-882.07 ; 2104.78,-852.13 cw(c2104.78,-930.22) C15.2@2160,-875 ; 2128.92,-852.13 cw(c2128.92,-906.08) C15.2@2167.07,-867.93 ; C15.2@2140.24,-871.89 ccw(c2120.48,-868.78) 2134.63,-854.63 ccw(c2144.52,-844.73) C15.2@2150.9,-857.19
OSCOUT: C14.2 U3.6 Y2.1 | length 746.6
  Top Layer w10: U3.6 1921.57,-601.57 Y2.1 2040,-600 2140,-600 C14.2 ; Y2.1@1960,-660 ccw(c1911.72,-660) 1945.86,-625.86 ccw(c1980,-591.72) 1980,-640 ccw(c1980,-591.72) 2014.14,-625.86 ccw(c2048.28,-660) Y2.1@2000,-660 ; 2075.5,-600 ccw(c2075.5,-500.5) C14.2@2145.86,-570.86 ; 2099.64,-600 ccw(c2099.64,-524.64) C14.2@2152.93,-577.93 ; 2123.79,-600 ccw(c2123.79,-548.79) C14.2@2160,-585
PA0: U3.10
PA1: U3.11
PA11: U3.32
PA13: U3.34
PA14: U3.37
PA15: U3.38
PB1: U3.19
PB2: R27.2 U3.20 | length 241.8
  Top Layer w10: U3.20 1583.47,-296.53 R27.2 ; 1585.97,-294.03 ccw(c1561.91,-269.98) R27.2@1595.34,-263.69 ; 1589.39,-290.61 cw(c1615,-316.21) R27.2@1615,-280 ; R27.2@1599.36,-280.64 ccw(c1584.47,-265.74) R27.2@1605.17,-261.85
PB3: U3.39
PB4: U3.40
PB5: U3.41
PB6: U3.42
PB7: U3.43
PB8: R1.1 U3.45 | length 884.1
  Top Layer w10: U3.45 1662.2,-847.2 1690,-875 1894.8,-875 1991.8,-972 2243,-972 2280,-935 R1.1 ; R1.1@2265.86,-899.14 cw(c2231.72,-933.28) 2280,-933.28 cw(c2328.28,-933.28) R1.1@2294.14,-899.14
PB10: R26.1 U3.21 | length 1392.8
  Top Layer w10: U3.21 1563.78,-458.78 1570,-465 1725,-465 1770,-420 1770,-400 v1(1785,-385) ; 1770,-423.08 cw(c1794.16,-423.08) v1@1788.51,-399.58 ; 1770,-410.38 cw(c1791.11,-410.38) v1@1786.17,-389.86 ; v1(2145,-475) 2185,-475 2203,-457 2318,-457 2345.5,-429.5 R26.1 ; v1@2155.61,-485.61 cw(c2181.21,-511.21) 2181.21,-475 cw(c2181.21,-438.79) v1@2155.61,-464.39 ; R26.1@2445.86,-443.64 ccw(c2411.72,-477.78) 2411.72,-429.5 ccw(c2411.72,-381.22) R26.1@2445.86,-415.36
  Bottom Layer w10: v1(1785,-385) 1790,-380 2050,-380 v1(2145,-475) ; v1@1788.54,-388.54 cw(c1809.14,-409.14) 1809.14,-380 cw(c1809.14,-360.86) v1@1795.61,-374.39 ; v1@1795.61,-395.61 cw(c1833.28,-433.28) 1833.28,-380 ; v1@2130,-475 ccw(c2093.79,-475) 2119.39,-449.39 ccw(c2145,-423.79) v1@2145,-460
PB11: R25.1 U3.22 | length 1481.6
  Top Layer w10: U3.22 1544.1,-469.09 1575,-500 1725,-500 1795,-430 ; v1@1813,-439 ccw(c1795,-452.5) 1795,-430 ; v1@1813,-421 cw(c1795,-407.5) 1795,-430 ; v1(1825,-430) 1795,-430 ; v1(2225,-500) 2429,-500 R25.1 ; v1@2235.61,-510.61 cw(c2261.21,-536.21) 2261.21,-500 cw(c2261.21,-463.79) v1@2235.61,-489.39 ; 2426.5,-497.5 cw(c2393.39,-530.61) R25.1@2440.07,-534.39 ; 2434.39,-505.39 ccw(c2460,-479.79) R25.1@2460,-516 ; R25.1@2441.8,-512.8 cw(c2421.69,-532.9) R25.1@2450.03,-535.19
  Bottom Layer w10: v1(1825,-430) 2045,-430 2130,-515 2210,-515 v1(2225,-500) ; v1@1835.61,-440.61 cw(c1861.21,-466.21) 1861.21,-430 cw(c1861.21,-393.79) v1@1835.61,-419.39 ; 2152.57,-515 ccw(c2152.57,-427.57) v1@2214.39,-489.39 ; 2176.72,-515 ccw(c2176.72,-451.72) v1@2221.46,-496.46 ; 2200.86,-515 ccw(c2200.86,-475.86) v1@2228.54,-503.54
PC13: U3.2
PC14: U3.3
PC15: U3.4
RST: U2.10 U3.29 | length 707
  Top Layer w10: U2.10 v1(1235,-310) ; U2.10@1202.22,-314.82 cw(c1213.84,-326.44) 1213.84,-310 cw(c1213.84,-293.56) U2.10@1202.22,-305.18 ; v1@1224.39,-320.61 ccw(c1198.79,-346.21) 1198.79,-310 ccw(c1198.79,-273.79) v1@1224.39,-299.39 ; v1(1335,-585) 1357.8,-562.2 U3.29
  Bottom Layer w10: v1@1235,-325 cw(c1235,-361.21) 1260.61,-335.61 cw(c1286.21,-310) v1@1250,-310 ; v1(1235,-310) 1360,-435 1360,-560 ; v1(1335,-585) 1360,-560 ; v1@1335.26,-570 ccw(c1335.84,-535.85) 1360,-560 ; v1@1350,-584.74 cw(c1384.15,-584.16) 1360,-560
S2_CLK: U2.8 U3.26 | length 330.4
  Top Layer w10: U2.8 1291.85,-410 1385,-503.15 U3.26 ; U2.8@1202.22,-414.82 cw(c1213.84,-426.44) 1213.84,-410 cw(c1213.84,-393.56) U2.8@1202.22,-405.18
S2_MISO: U2.6 U3.27 | length 494.8
  Top Layer w10: U2.6 v1(1230,-510) ; U2.6@1202.22,-514.82 cw(c1213.84,-526.44) 1213.84,-510 cw(c1213.84,-493.56) U2.6@1202.22,-505.18 ; v1@1219.39,-520.61 ccw(c1193.79,-546.21) 1193.79,-510 ccw(c1193.79,-473.79) v1@1219.39,-499.39 ; v1(1315,-505) 1332.84,-522.84 U3.27
  Bottom Layer w10: v1(1230,-510) 1310,-510 v1(1315,-505) ; v1@1240.61,-520.61 cw(c1266.21,-546.21) 1266.21,-510 cw(c1266.21,-473.79) v1@1240.61,-499.39 ; 1266.72,-510 ccw(c1266.72,-456.72) v1@1304.39,-494.39 ; v1@1304.39,-515.61 ccw(c1290.86,-529.14) 1290.86,-510 ccw(c1290.86,-480.86) v1@1311.46,-501.46
S2_MOSI: U2.7 U3.28 | length 361.1
  Top Layer w10: U2.7 1255,-460 1270,-475 1270,-535 1277.52,-542.52 U3.28 ; U2.7@1202.22,-464.82 cw(c1213.84,-476.44) 1213.84,-460 cw(c1213.84,-443.56) U2.7@1202.22,-455.18
SCK: U3.15
SI: U3.17
SO: U3.16
T_RST: C12.1 pad.0@2180,-360 R18.2 R22.2 U3.7 | length 1460.1
  Top Layer w10: U3.7 1928.11,-581.89 1970,-540 1970,-390 R22.2 ; 1967.5,-392.5 cw(c1988.72,-413.71) R22.2@1995.49,-384.48 ; 1969.39,-390.61 ccw(c1943.79,-365) R22.2@1980,-365 ; 1970,-485.71 cw(c2120.71,-485.71) R22.2@2014.14,-379.14 ; 1970,-461.57 cw(c2096.57,-461.57) R22.2@2007.07,-372.07 ; 1970,-437.43 cw(c2072.43,-437.43) R22.2@2000,-365 ; 1970,-413.28 cw(c2048.28,-413.28) R22.2@1992.93,-357.93 ; 1970,-389.14 cw(c2024.14,-389.14) R22.2@1985.86,-350.86
  Top Layer w20: R22.2 C12.1 R18.2 ; R22.2@2010.61,-370.61 cw(c2036.21,-396.21) 2036.21,-360 cw(c2036.21,-323.79) R22.2@2010.61,-349.39 ; C12.1@2109.39,-370.61 ccw(c2083.79,-396.21) 2083.79,-360 ccw(c2083.79,-323.79) C12.1@2109.39,-349.39 ; C12.1@2130.61,-370.61 cw(c2156.21,-396.21) 2156.21,-360 cw(c2156.21,-323.79) C12.1@2130.61,-349.39 ; pad.0@2165.86,-374.14 ccw(c2131.72,-408.28) 2131.72,-360 ccw(c2131.72,-311.72) pad.0@2165.86,-345.86 ; pad.0@2194.14,-374.14 cw(c2228.28,-408.28) 2228.28,-360 cw(c2228.28,-311.72) pad.0@2194.14,-345.86 ; R18.2@2229.39,-370.61 ccw(c2203.79,-396.21) 2203.79,-360 ccw(c2203.79,-323.79) R18.2@2229.39,-349.39
TCT: C1.1 L1.1 R3.2 R4.2 R15.1 | length 867.6
  Top Layer w25: R3.2@471.16,308.84 ccw(c449.82,330.18) 480,330.18 ccw(c510.18,330.18) R3.2@488.84,308.84 ; R15.1@471.16,391.16 cw(c449.82,369.82) 480,369.82 cw(c510.18,369.82) R15.1@488.84,391.16 ; R15.1 R3.2 560,300 C1.1 R4.2 ; R3.2@493.84,291.16 cw(c515.18,269.82) 515.18,300 cw(c515.18,330.18) R3.2@493.84,308.84 ; 610.13,249.87 cw(c580.25,220) C1.1@622.5,220 ; C1.1@657.5,220 ccw(c699.75,220) 669.87,190.13 ; 710.13,149.87 cw(c680.25,120) R4.2@722.5,120 ; R4.2@736.16,111.16 cw(c678.61,53.61) L1.1@760,53.61 ; L1.1@751.16,48.84 ccw(c729.82,70.18) 760,70.18 ccw(c790.18,70.18) L1.1@768.84,48.84 ; L1.1 R4.2@760,120
TPIN+: JHR.11 R5.1 U2.13 | length 1810.9
  Top Layer w25: JHR.11 465,-90 v1(475,-80) ; 420.68,-90 cw(c420.68,-159.32) v1@469.7,-110.3 ; 432.75,-90 ccw(c432.75,-37.75) v1@469.7,-74.7 ; U2.13 1320,-160 R5.1 ; 1235.32,-160 cw(c1235.32,-309.68) R5.1@1341.16,-203.84 ; 1267.75,-160 cw(c1267.75,-212.25) v1@1304.7,-175.3 ; v1@1295.68,-160 cw(c1295.68,-249.32) R5.1@1358.84,-186.16 ; v1@1304.47,-178.4 cw(c1318.19,-219.59) R5.1@1348.89,-188.89 ; v1@1310,-177.5 cw(c1310,-243.89) R5.1@1356.95,-196.95 ; v1@1325.13,-165.13 cw(c1295.25,-195) R5.1@1337.5,-195
  Bottom Layer w25: v1@462.63,-92.37 ccw(c493.11,-61.89) v1@493.11,-105 ; v1(475,-105) 1245,-105 v1(1310,-170) ; v1@480.3,-74.7 ccw(c553.46,-1.54) 553.46,-105 ; 1279.52,-139.52 cw(c1224.04,-195) v1@1302.5,-195
  other v1: 1310,-195
TPIN-: JHR.9 R8.1 U2.12 | length 1738.2
  Top Layer w20: 1284.16,-283.42 cw(c1301.29,-301.16) 1318.72,-283.72 ; v1@1298.05,-297.81 cw(c1315.43,-315.79) R8.1@1333.11,-298.11 ; v1@1304.27,-279.27 cw(c1304.27,-303.41) 1321.34,-286.34 cw(c1338.41,-269.27) v1@1314.27,-269.27 ; v1@1312.07,-312.07 cw(c1353.28,-353.28) R8.1@1353.28,-295 ; v1@1314.76,-307.19 cw(c1330,-310.62) R8.1@1330,-295 ; 1320,-285 R8.1@1330,-295 ; R8.1 R8.1@1330,-295
  Top Layer w25: JHR.9 460,-190 v1(475,-175) ; v1@469.7,-210.3 ccw(c420.68,-259.32) 420.68,-190 ccw(c420.68,-120.68) v1@469.7,-169.7 ; U2.12 1245,-210 v1(1304.27,-269.27) 1320,-285 ; v1@1314.27,-279.27 ccw(c1332.42,-261.12) R8.1@1344.24,-283.9 ; v1@1314.47,-279.47 cw(c1293.24,-300.7) v1@1321.43,-311.01
  Bottom Layer w25: v1@462.63,-192.63 cw(c505.18,-235.18) 505.18,-175 ; v1(475,-175) 1200,-175 1294.27,-269.27 v1(1304.27,-269.27) ; v1@480.3,-210.3 cw(c565.53,-295.53) 565.53,-175 ; 1274.4,-249.4 ccw(c1304.27,-219.52) v1@1304.27,-261.77
  other v1: 1305,-305 475,-205
TPOUT+: JHR.16 R3.1 U2.17 | length 1576.1
  Top Layer w25: v1(310,320) 330,300 R3.1 ; v1@315.3,279.7 cw(c364.32,230.68) R3.1@364.32,300 ; v1@315.3,325.3 ccw(c376.39,386.39) R3.1@376.39,300 ; v1@319.63,310.37 cw(c298.66,289.39) v1@326.32,278.68 ; R3.1@366.16,291.16 ccw(c344.82,269.82) 344.82,300 ccw(c344.82,330.18) R3.1@366.16,308.84 ; JHR.16 475,160 500,160 560,100 560,-150 620,-210 U2.17 ; 506.59,153.41 cw(c468.18,115) v1@522.5,115 ; 518.05,141.95 cw(c471.11,95) v1@537.5,95 ; v1@530.16,107.5 cw(c531.26,56.26) 567.5,92.5 ; v1@539.7,89.7 cw(c490.68,40.68) 560,40.68
  Bottom Layer w25: v1@310,312.5 cw(c310,258.18) 348.41,296.59 ; v1@317.14,287.31 cw(c347.77,297.23) v1@325,320 ; 330,300 315,300 310,305 v1@325,320 ; v1@528.66,116.34 cw(c507.32,95) v1@537.5,95 ; v1(530,115) v1@325,320
  other v1: 545,95 310,285
TPOUT-: JHR.14 R4.1 U2.16 | length 1271.3
  Top Layer w25: JHR.14 290,60 255,95 255,200 280,225 455,225 535,225 610,150 610,-85 685,-160 U2.16 ; 610,29.47 cw(c725.53,29.47) R4.1@643.84,111.16 ; 610,89.82 cw(c665.18,89.82) R4.1@626.16,128.84 ; 671.84,-146.84 ccw(c705.28,-113.4) U2.16@705.28,-160.69 ; 610.13,149.87 cw(c580.25,120) 622.5,120 ccw(c580.25,120) 610.13,149.87
TRST: J1.4 R19.2 | length 512.2
  Top Layer w10: R19.2 2655,-110 2681.74,-136.74 2860.74,-136.74 J1.4 ; R19.2@2584.14,-124.14 cw(c2618.28,-158.28) 2618.28,-110 cw(c2618.28,-61.72) R19.2@2584.14,-95.86 ; J1.4@2878.74,-98.74 cw(c2830.46,-98.74) 2864.6,-132.88 cw(c2898.74,-167.02) J1.4@2898.74,-118.74
TRXD: J1.5 R24.1 | length 496.4
  Top Layer w10: R24.1 2576.5,-205 2670,-205 2697.52,-177.48 J1.5 ; R24.1@2570,-216.5 cw(c2597.76,-244.26) 2597.76,-205 ; R24.1@2577.07,-223.57 cw(c2621.91,-268.41) 2621.91,-205 ; R24.1@2584.14,-230.64 cw(c2646.05,-292.55) 2646.05,-205 ; J1.5@2805.86,-191.62 ccw(c2771.72,-225.77) 2771.72,-177.48 ccw(c2771.72,-129.2) J1.5@2805.86,-163.34
TTXD: J1.6 R23.1 | length 545.7
  Top Layer w10: R23.1 2622,-323 2729.52,-215.48 2860.74,-215.48 J1.6 ; R23.1@2584.14,-337.14 cw(c2618.28,-371.28) 2618.28,-323 cw(c2618.28,-274.72) R23.1@2584.14,-308.86 ; J1.6@2878.74,-177.48 cw(c2830.46,-177.48) 2864.6,-211.62 cw(c2898.74,-245.77) J1.6@2898.74,-197.48
U2_RX: U3.13
U2_TX: U3.12
VIN: C5.1 D1.2 R16.2 U1.1 | length 2585
  Top Layer w20: R16.2 2510,280 D1.2 ; R16.2@2330,120 ccw(c2330,168.28) 2364.14,134.14 ; R16.2@2345,105 cw(c2369.14,105) R16.2@2352.07,122.07 ; D1.2@2686.72,251.72 ccw(c2618.43,183.43) 2618.43,280 ccw(c2618.43,376.57) D1.2@2686.72,308.28
  Top Layer w40: U1.1 U1.1@1686.93,571.93
  Top Layer w50: U1.1@1686.93,571.93 1805,690 2490,690 C5.1 2570,640 2665,545 2665,330 D1.2 ; U1.1@1720.99,557.79 cw(c1837.33,557.79) 1755.06,640.06 ; C5.1@2540,600.04 cw(c2540,431.14) 2659.43,550.57 ; C5.1@2540,650.04 cw(c2540,601.85) 2574.07,635.93 ; 2665,340.36 ccw(c2775.36,340.36) D1.2@2697.32,262.32 ; 2665,461.07 ccw(c2896.07,461.07) D1.2@2732.68,297.68
WOL: U2.5
pads on no net: J1.10 JHR.4 JHR.5 JHR.10 JHR.12 JHR.13 RJ45.0 RJ45.4 RJ45.5 RJ45.7 RJ45.8 U2.26 U2.27 U3.14 U3.33

## Polygon pours and split planes (outlines as drawn)
GND on Top Layer "Bottom Layer-No Net" (solid, remove dead copper): -376.73,776.76 -376.73,385 -371.73,390 50,390 245,195 245,-240 350,-345 350,-1069.69 3048.46,-1069.69 3048.46,776.76 -376.73,776.76
GND on Bottom Layer "Bottom Layer-No Net" (solid, remove dead copper): -376.73,776.76 -376.73,390 50,390 175,265 245,195 245,-100 245,-235 350,-340 350,-1060 350,-1069.69 3048.46,-1069.69 3048.46,776.76 -376.73,776.76

## Keep-outs
Keep-Out Layer:
  lines w1: -376.73,-1069.69 -376.73,296.45 -376.73,776.76 213.82,776.76 3048.46,776.76 3048.46,-1069.69 213.82,-1069.69 -376.73,-1069.69

## Silkscreen, mask and mechanical layers (free items; w line width, h text height)
Top Overlay:
  text "XiRei" at -335,685 h60
  text "TCP/IP V1.1" at -340,590 h60
  text "20130703" at -335,515 h60
  text "TCP/IP" at 2755,400 h40